# Altium PCB PCB1.PcbDoc
Units mm, origin at the board's own origin, x right, y up, seen from the top; angles counter-clockwise.
Board outline 25.91 x 40.39 mm, 4 copper layers (Top Layer, Mid Layer 1, Mid Layer 2, Bottom Layer), stack 0.97 mm thick; 40 components, 33 nets, 144 pads, 58 vias.
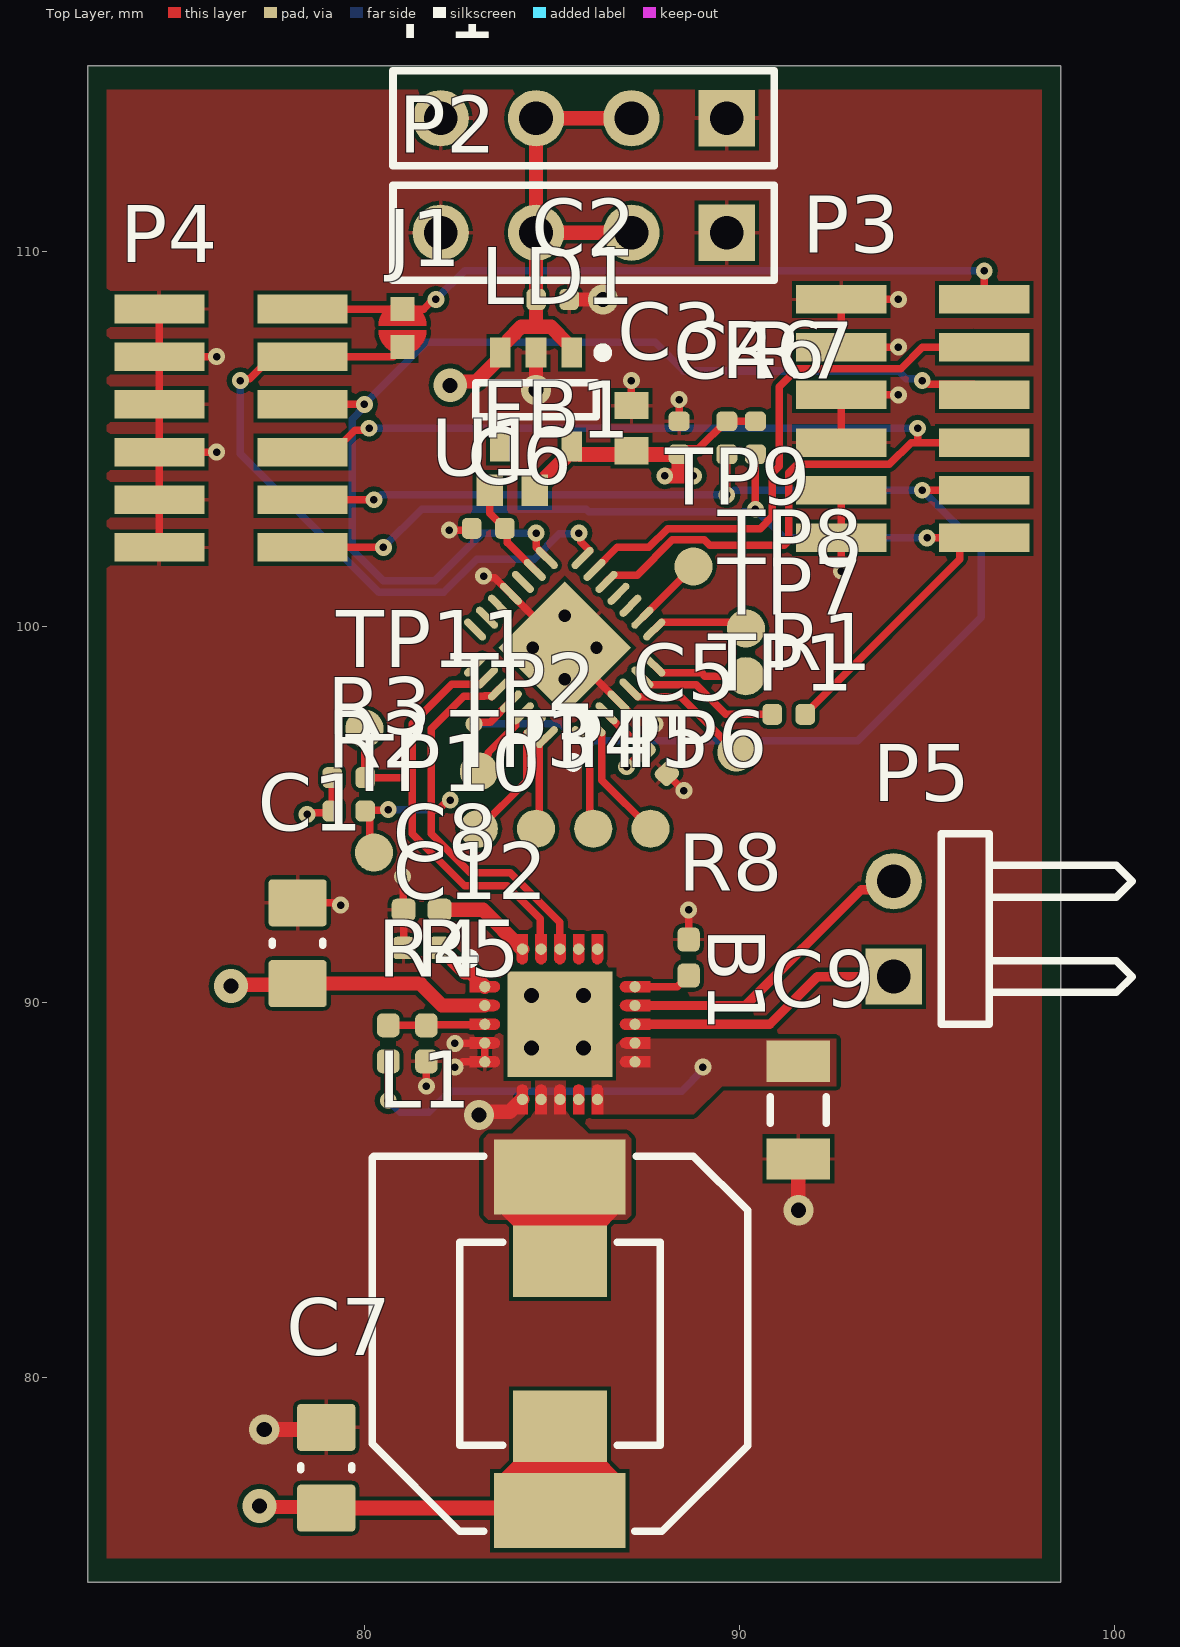
[diagram p0: Top Layer view]
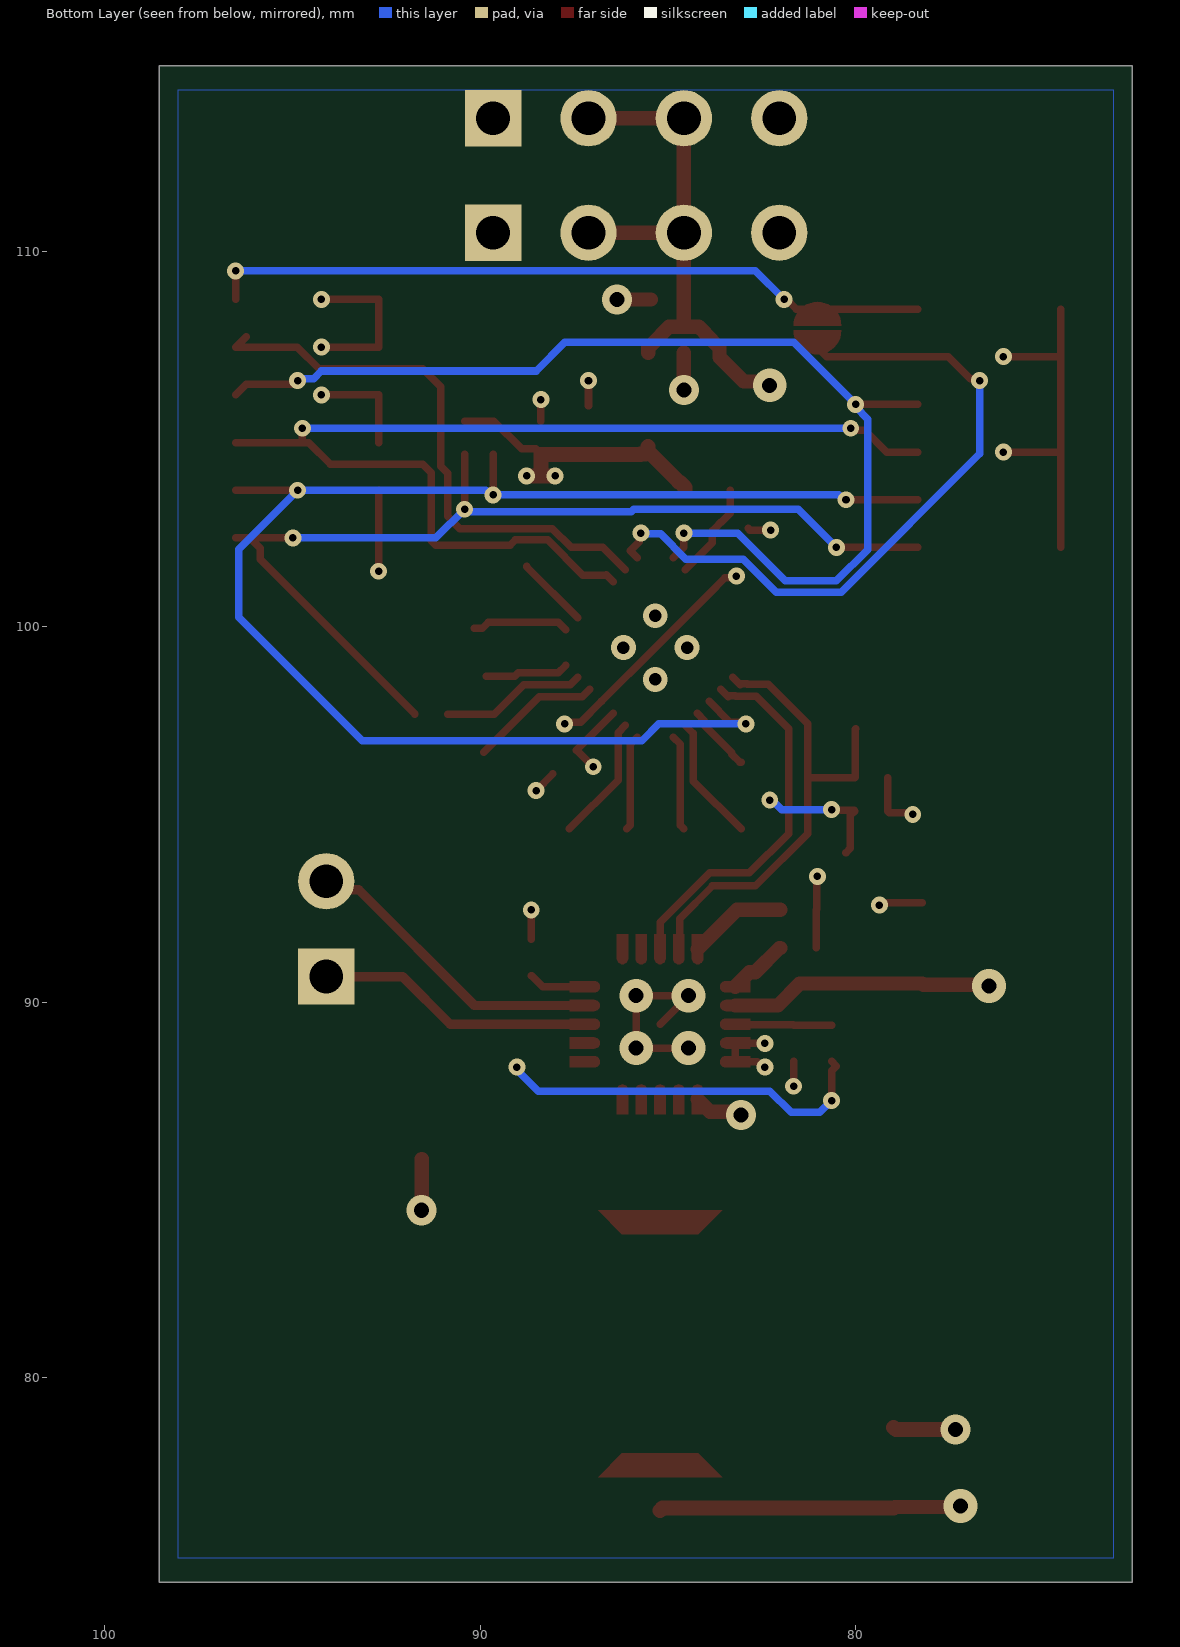
[diagram p1: Bottom Layer view, seen from below]
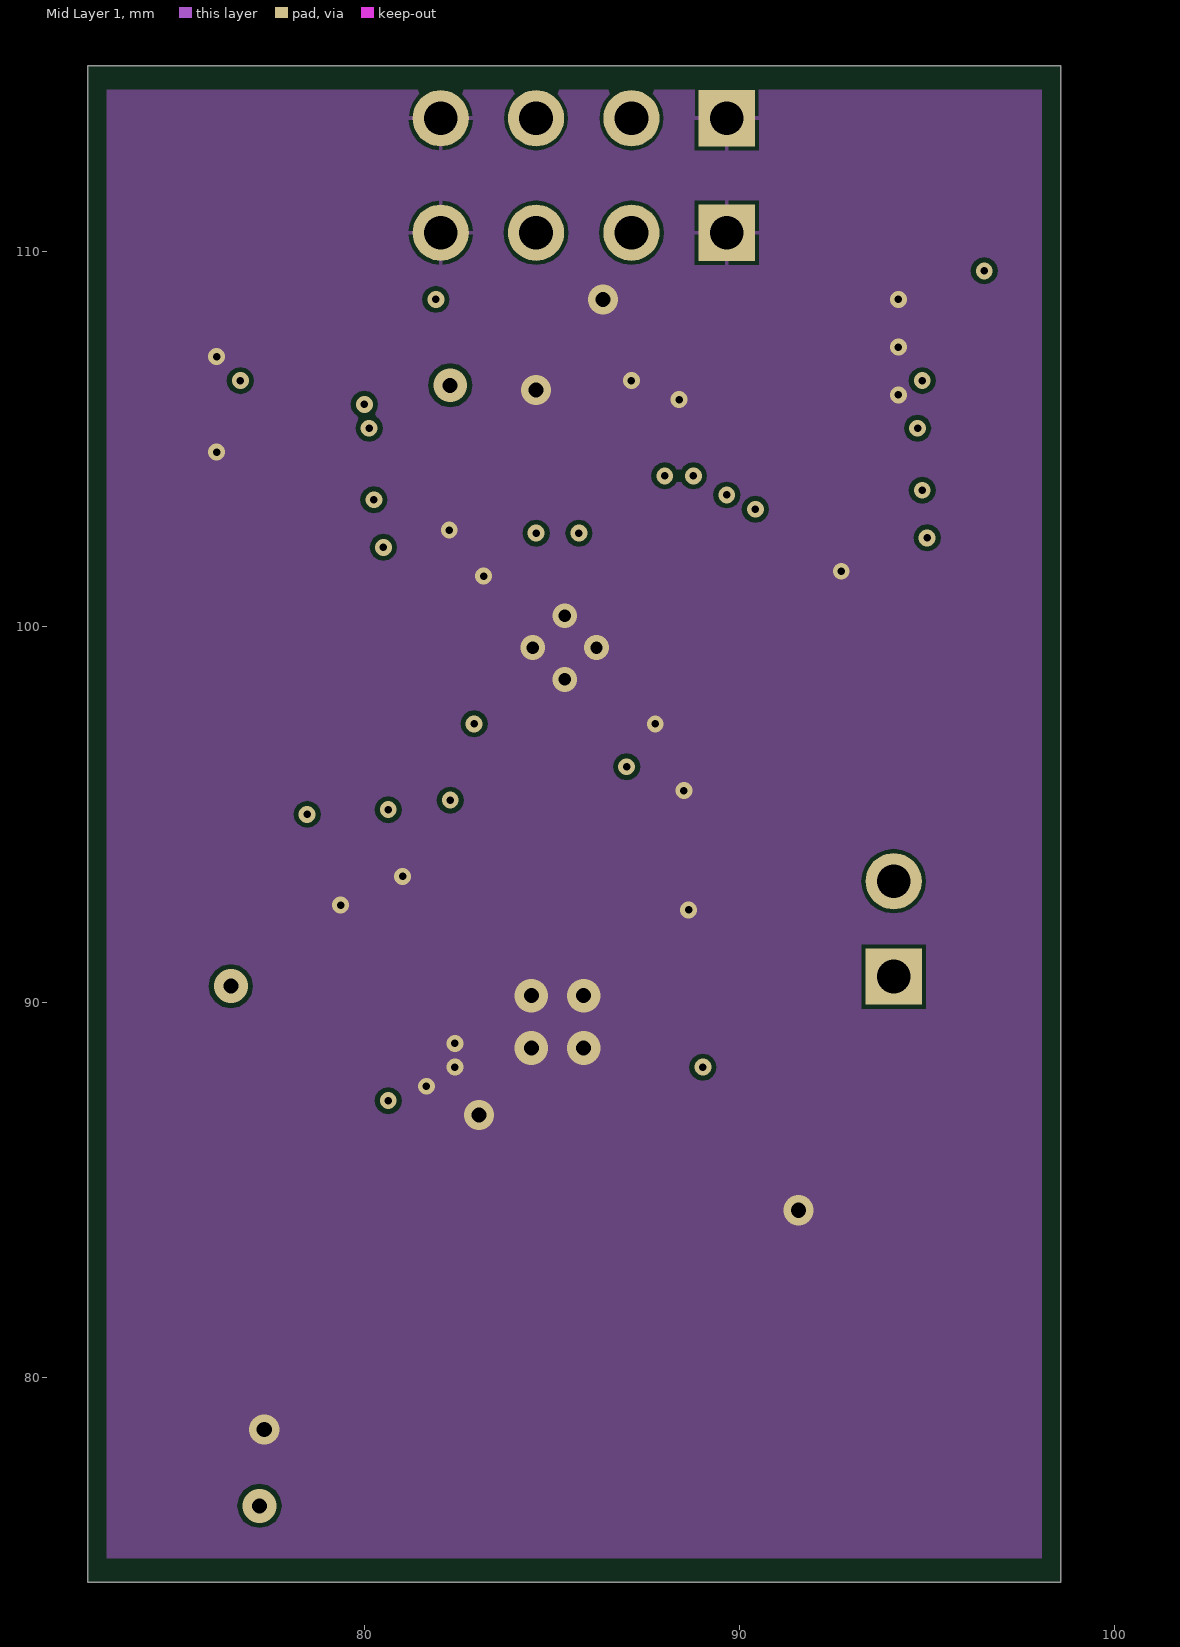
[diagram p2: Mid Layer 1]
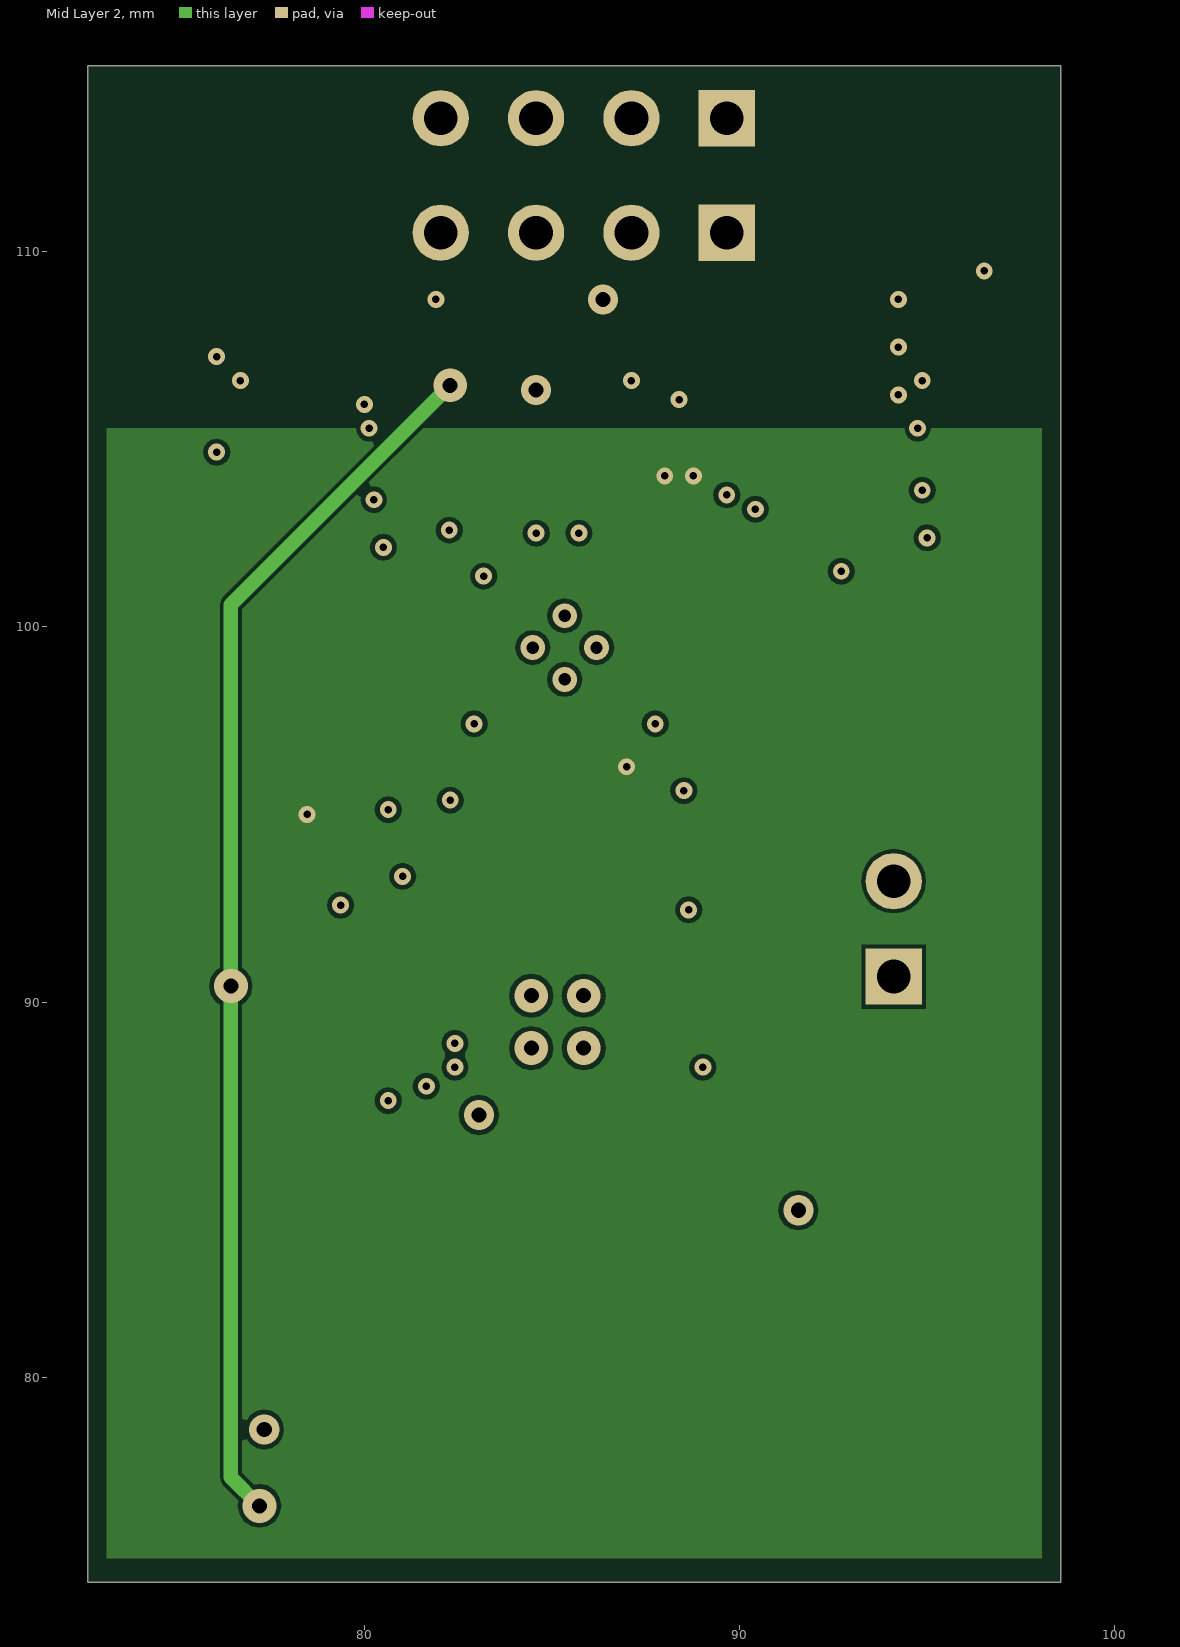
[diagram p3: Mid Layer 2]
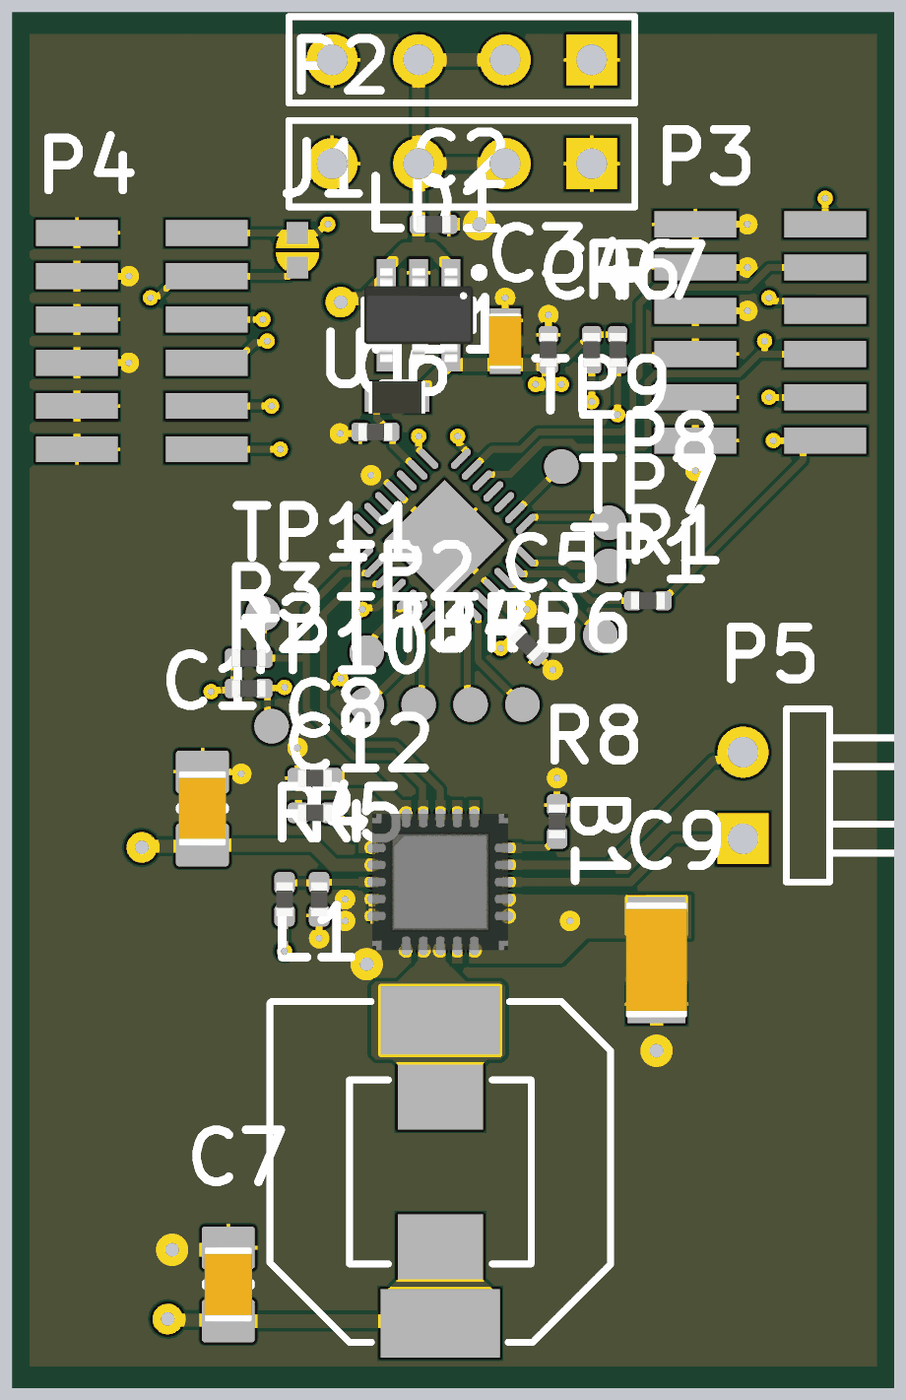
[diagram p4: 3D render of the assembled board from above, using the file's embedded part models]

## Layer stack, top to bottom
Top Solder: solder mask 0.0127, Solder Resist, Dk 3.8
Top Layer: signal copper 0.035
Dielectric 1: prepreg 0.1, 2313, Dk 4.05
Mid Layer 1: signal copper 0.0175
Core: core 0.665, FR-4, Dk 4.5
Mid Layer 2: signal copper 0.0175
Dielectric 2: prepreg 0.1, 2313, Dk 4.05
Bottom Layer: signal copper 0.035
Bottom Solder: solder mask 0.0127, Solder Resist, Dk 3.8

## Board outline
72.644,74.549 72.644,114.935 98.552,114.935 98.552,74.549

## Design rules (kind name [scope] priority, off if disabled: settings)
BoardOutlineClearance [All] p1: gap=0.2 ignorepadtopadclearanceinfootprint=FALSE
Clearance [All] p1: gap=0.102 ignorepadtopadclearanceinfootprint=FALSE except(0.127: Arc-Via Track-Via SMDPad-Via THPad-Via Via-Via Via-Fill Via-Poly Via-Region Via-Text; 0.25: Arc-Hole Track-Hole SMDPad-Hole THPad-Hole Via-Hole Fill-Hole Poly-Hole Region-Hole Text-Hole)
ComponentClearance [All] p1: gap=0.102 collisioncheckmode=3 verticalgap=0.102 showdistances=TRUE
DiffPairsRouting [All] p1: maxlimit=0.102 minlimit=0.102 mostfreqgap=0.102 toplayer_minwidth=0.102 toplayer_maxwidth=1816.048 toplayer_prefwidth=0.102 midlayer1_minwidth=0.102 midlayer1_maxwidth=1816.048 midlayer1_prefwidth=0.102 midlayer2_minwidth=0.102 midlayer2_maxwidth=1816.048 midlayer2_prefwidth=0.102 bottomlayer_minwidth=0.102 bottomlayer_maxwidth=1816.048 bottomlayer_prefwidth=0.102 maxuncoupledlength=12.7
Height [All] p1: minheight=0 maxheight=1816.048 prefheight=12.7
HoleSize [All] p1: absolutevalues=TRUE maxlimit=6.3 minlimit=0.2 maxpercent=80.000 minpercent=20.000
HoleToHoleClearance [All] p1: gap=0.25 allowstackedmicrovias=FALSE
MinimumAnnularRing [All] p1: minimumring=0.076
MinimumSolderMaskSliver [All] p1: minsoldermaskwidth=0
PlaneClearance [All] p1: clearance=0.102
PlaneConnect PlaneConnectPowerPads [InPadClass('PowerPads')] p1: planeconnectstyle=Direct reliefexpansion=0.508 reliefentries=4 reliefconductorwidth=0.254 reliefairgap=0.254
PlaneConnect [All] p2: pad.planeconnectstyle=Relief pad.reliefexpansion=0.3 pad.reliefentries=4 pad.reliefconductorwidth=0.102 pad.reliefairgap=0.102 via.planeconnectstyle=Direct via.reliefexpansion=0.3 via.reliefentries=4 via.reliefconductorwidth=0.127 via.reliefairgap=0.127
PolygonConnect PolygonConnectPowerPads [All vs (InPadClass('PowerPads'))] p1: connectstyle=Direct reliefconductorwidth=0.254 reliefentries=4 polygonreliefangle="90 Angle" airgapwidth=0.254
PolygonConnect [All] p2: thpad.connectstyle=Relief thpad.reliefconductorwidth=0.102 thpad.reliefentries=4 thpad.polygonreliefangle="90 Angle" thpad.airgapwidth=0.102 smdpad.connectstyle=Relief smdpad.reliefconductorwidth=0.102 smdpad.reliefentries=4 smdpad.polygonreliefangle="90 Angle" smdpad.airgapwidth=0.102 via.connectstyle=Direct via.reliefconductorwidth=0.127 via.reliefentries=4 via.polygonreliefangle="90 Angle" via.airgapwidth=0.127
RoutingVias [All] p1: holewidth=0.2 width=0.45 viastyle="Through Hole" minholewidth=0.2 minwidth=0.45 maxholewidth=6.3 maxwidth=6.55
SilkToSilkClearance [All] p1: silktosilkclearance=0
SilkToSolderMaskClearance [IsPad] p1: minsilkscreentomaskgap=0.102 clearancetoexposedcopper=TRUE
SolderMaskExpansion [All] p1: expansion=0.075 istentingtop=FALSE
Width [All] p1: maxlimit=1816.048 minlimit=0.102 preferedwidth=0.102
20 further rules are at their usual default settings.

## Classes and differential pairs
component class U_Sheet2: C1 C7 C8 C9 C12 L1 P5 R4 R5 R8
component class Sheet1: C2 C3 C4 C5 C6 FB1 J1 LD1 P1 P2 P3 P4 R1 R2 R3 R6 R7 TP1 TP2 TP3 TP4 TP5 TP6 TP7 TP8 TP9 TP10 TP11 U1

## Components (designator, comment, footprint, x,y, rotation, side; value= is the part's Value field where it differs from the comment)
B1 "DRV2667RGPT" QFN50P400X400X100-21N-D 85.217,89.408 r0 top
C1 "1uF" C2012_0805I_M 78.232,91.567 r90 top
C2 "100n" R1005_0402i_L 85.022,108.712 r0 top
C3 "1u" C1608_0603I_L 87.122,105.283 r90 top
C4 "100n" R1005_0402i_L 88.392,105.029 r90 top
C5 "100n" R1005_0402i_L 87.757,96.393 r315 top
C6 "100n" R1005_0402i_L 83.312,102.616 r180 top
C7 "10uF" C2012_0805I_M 78.994,77.597 r90 top
C8 "0.1uF" R1005_0402i_M 81.534,92.456 r180 top
C9 "0.1uF" C3216_1206I_L 91.567,87.122 r270 top
C12 "0.1uF" R1005_0402i_M 81.534,91.44 r180 top
FB1 "FERITTE BEAD" R1608_0603I_L 83.947,103.632 r180 top
J1 "Terminator" solderJumper 81.026,107.95 r270 top
L1 "3.3uH" INDUCTOR 85.217,80.899 r90 top
LD1 "NCP115 3.3V" TSOP95P280X110-6L 84.582,106.045 r270 top
P1 "PWR" HDR1X4 89.662,113.538 r180 top
P2 "PWR" HDR1X4 89.662,110.49 r180 top
P3 "Input" "1.27mm SMD conn" 94.615,105.537 r90 top
P4 "Output" "1.27mm SMD conn" 76.454,105.283 r90 top
P5 "Header 2H" HDR1X2H 94.107,90.678 r90 top
R1 "500" R1005_0402i_L 91.313,97.663 r180 top
R2 "10k" R1005_0402i_L 79.592,95.086 r0 top
R3 "10k" R1005_0402i_L 79.592,95.975 r0 top
R4 "768k" R1005_0402i_M 80.645,88.9 r90 top
R5 "9.76k" R1005_0402i_M 81.661,88.9 r270 top
R6 "100k" R1005_0402i_L 89.662,105.029 r270 top
R7 "100k" R1005_0402i_L 90.424,105.029 r270 top
R8 "13k" R1005_0402i_M 88.646,91.186 r90 top
TP1 "PAD" PAD 89.916,96.647 r90 top
TP2 "PAD" PAD 83.058,96.139 r90 top
TP3 "PAD" PAD 83.058,94.615 r90 top
TP4 "PAD" PAD 84.582,94.615 r90 top
TP5 "PAD" PAD 86.106,94.615 r90 top
TP6 "PAD" PAD 87.63,94.615 r90 top
TP7 "PAD" PAD 90.17,98.679 r90 top
TP8 "PAD" PAD 90.17,99.949 r90 top
TP9 "PAD" PAD 88.773,101.6 r90 top
TP10 "PAD" PAD 80.264,93.98 r90 top
TP11 "PAD" PAD 80.01,97.282 r90 top
U1 "ATtiny88-MMU" 28M1_N 85.344,99.441 r135 top

## Footprints (in the part's own frame and the unit in brackets; to place one, negate y for a bottom-side part, rotate by r counter-clockwise, add the part's x,y. Pads: shape width x height; smd on the part's side, far side on the other; paste and mask are expansions set on the pad)
"1.27mm SMD conn" [mm]
  rect 0.76x2.4 smd: 1(3.175,1.905) 2(3.175,-1.905) 3(1.905,1.905) 4(1.905,-1.905) 5(0.635,1.905) 6(0.635,-1.905) 7(-0.635,1.905) 8(-0.635,-1.905) 9(-1.905,1.905) 10(-1.905,-1.905) 11(-3.175,1.905) 12(-3.175,-1.905)
28M1_N [mm] "QFN, 28-Leads, Body 4x4mm, Pitch 0.45mm, IPC Medium Density"
  oval 0.75x0.2 smd: 1(-2.025,1.35) 2(-2.025,0.9) 3(-2.025,0.45) 4(-2.025,0) 5(-2.025,-0.45) 6(-2.025,-0.9) 7(-2.025,-1.35) 15(2.025,-1.35) 16(2.025,-0.9) 17(2.025,-0.45) 18(2.025,0) 19(2.025,0.45) 20(2.025,0.9) 21(2.025,1.35)
  oval 0.2x0.75 smd: 8(-1.35,-2.025) 9(-0.9,-2.025) 10(-0.45,-2.025) 11(0,-2.025) 12(0.45,-2.025) 13(0.9,-2.025) 14(1.35,-2.025) 22(1.35,2.025) 23(0.9,2.025) 24(0.45,2.025) 25(0,2.025) 26(-0.45,2.025) 27(-0.9,2.025) 28(-1.35,2.025)
  rect 2.5x2.5 smd: 29(0,0)
  silkscreen extent -2.45,1.88 -2.2,2.12, body extent -2.02,-2.02 2.02,2.02, height 1
C1608_0603I_L [mm] "Chip Capacitor, 2-Leads, Body 1.57x0.85mm, IPC High Density"
  rect 0.72x0.9 smd: 1(-0.6,0) 2(0.6,0)
  body extent -0.82,-0.48 0.82,0.48, height 0.95
C2012_0805I_M [mm] "Chip Capacitor, 2-Leads, Body 2.05x1.25mm, IPC Low Density"
  rrect15% 1.25x1.55 smd: 1(-1.075,0) 2(1.075,0)
  silkscreen extent -0.05,-0.67 0.05,0.67, body extent -1.1,-0.7 1.1,0.7, height 1.4
C3216_1206I_L [mm] "Chip Capacitor, 2-Leads, Body 3.20x1.60mm, IPC High Density"
  rect 1.1x1.7 smd: 1(-1.3,0) 2(1.3,0)
  silkscreen extent -0.35,-0.75 0.35,0.75, body extent -1.7,-0.9 1.7,0.9, height 1.8
HDR1X2H [mm] "Connector; Header; 2 Position; Right Angle"
  rect 1.5x1.5 hole 0.9: 1(0,0)
  round 1.5 hole 0.9: 2(2.54,0)
  silkscreen extent -1.27,-6.35 3.81,-1.27
HDR1X4 [mm] "Connector; Header; 4 Position"
  rect 1.5x1.5 hole 0.9: 1(0,0)
  round 1.5 hole 0.9: 2(2.54,0) 3(5.08,0) 4(7.62,0)
  silkscreen extent -1.27,-1.27 8.89,1.27
INDUCTOR [mm]
  rect 2x3.5 smd: 1(-4.445,0) 2(4.445,0)
  rect 1.9x2.5 smd: 1(-2.2,0) 2(2.2,0)
  Top Layer region: 3.556,-1.651 2.921,-1.016 2.921,1.016 3.556,1.651
  Top Layer region: -1.143,1.778
  Top Layer region: -3.556,1.651 -2.921,1.016 -2.921,-1.016 -3.556,-1.651
  silkscreen extent -5,-5 5,5
PAD [mil]
  round 40 smd: 1(0,0)
QFN50P400X400X100-21N-D [mm]
  round 0.3 smd: 1(-2,1) 2(-2,0.5) 3(-2,0) 4(-2,-0.5) 5(-2,-1) 6(-1,-2) 7(-0.5,-2) 8(0,-2) 9(0.5,-2) 10(1,-2) 11(2,-1) 12(2,-0.5) 13(2,0) 14(2,0.5) 15(2,1) 16(1,2) 17(0.5,2) 18(0,2) 19(-0.5,2) 20(-1,2)
  rect 2.8x2.8 smd: 21(0,0)
  Top Layer region: -0.85,2.4 -0.85,1.75 -0.855,1.711 -0.87,1.675 -0.894,1.644 -0.925,1.62 -0.961,1.605 -1,1.6 -1.039,1.605 -1.075,1.62 -1.106,1.644 -1.13,1.675 -1.145,1.711 -1.15,1.75 -1.15,1.75 -1.15,2.4 -0.85,2.4
  Top Layer region: -0.35,2.4 -0.35,1.75 -0.355,1.711 -0.37,1.675 -0.394,1.644 -0.425,1.62 -0.461,1.605 -0.5,1.6 -0.539,1.605 -0.575,1.62 -0.606,1.644 -0.63,1.675 -0.645,1.711 -0.65,1.75 -0.65,1.75 -0.65,2.4 -0.35,2.4
  Top Layer region: 0.15,2.4 0.15,1.75 0.145,1.711 0.13,1.675 0.106,1.644 0.075,1.62 0.039,1.605 0,1.6 -0.039,1.605 -0.075,1.62 -0.106,1.644 -0.13,1.675 -0.145,1.711 -0.15,1.75 -0.15,1.75 -0.15,2.4 0.15,2.4
  Top Layer region: 0.65,2.4 0.65,1.75 0.645,1.711 0.63,1.675 0.606,1.644 0.575,1.62 0.539,1.605 0.5,1.6 0.461,1.605 0.425,1.62 0.394,1.644 0.37,1.675 0.355,1.711 0.35,1.75 0.35,1.75 0.35,2.4 0.65,2.4
  Top Layer region: 1.15,2.4 1.15,1.75 1.145,1.711 1.13,1.675 1.106,1.644 1.075,1.62 1.039,1.605 1,1.6 0.961,1.605 0.925,1.62 0.894,1.644 0.87,1.675 0.855,1.711 0.85,1.75 0.85,1.75 0.85,2.4 1.15,2.4
  Top Layer region: 2.4,0.85 1.75,0.85 1.711,0.855 1.675,0.87 1.644,0.894 1.62,0.925 1.605,0.961 1.6,1 1.605,1.039 1.62,1.075 1.644,1.106 1.675,1.13 1.711,1.145 1.75,1.15 1.75,1.15 2.4,1.15 2.4,0.85
  Top Layer region: 2.4,0.35 1.75,0.35 1.711,0.355 1.675,0.37 1.644,0.394 1.62,0.425 1.605,0.461 1.6,0.5 1.605,0.539 1.62,0.575 1.644,0.606 1.675,0.63 1.711,0.645 1.75,0.65 1.75,0.65 2.4,0.65 2.4,0.35
  Top Layer region: 2.4,-0.15 1.75,-0.15 1.711,-0.145 1.675,-0.13 1.644,-0.106 1.62,-0.075 1.605,-0.039 1.6,0 1.605,0.039 1.62,0.075 1.644,0.106 1.675,0.13 1.711,0.145 1.75,0.15 1.75,0.15 2.4,0.15 2.4,-0.15
  Top Layer region: 2.4,-0.65 1.75,-0.65 1.711,-0.645 1.675,-0.63 1.644,-0.606 1.62,-0.575 1.605,-0.539 1.6,-0.5 1.605,-0.461 1.62,-0.425 1.644,-0.394 1.675,-0.37 1.711,-0.355 1.75,-0.35 1.75,-0.35 2.4,-0.35 2.4,-0.65
  Top Layer region: 2.4,-1.15 1.75,-1.15 1.711,-1.145 1.675,-1.13 1.644,-1.106 1.62,-1.075 1.605,-1.039 1.6,-1 1.605,-0.961 1.62,-0.925 1.644,-0.894 1.675,-0.87 1.711,-0.855 1.75,-0.85 1.75,-0.85 2.4,-0.85 2.4,-1.15
  Top Layer region: 0.85,-2.4 0.85,-1.75 0.855,-1.711 0.87,-1.675 0.894,-1.644 0.925,-1.62 0.961,-1.605 1,-1.6 1.039,-1.605 1.075,-1.62 1.106,-1.644 1.13,-1.675 1.145,-1.711 1.15,-1.75 1.15,-1.75 1.15,-2.4 0.85,-2.4
  Top Layer region: 0.35,-2.4 0.35,-1.75 0.355,-1.711 0.37,-1.675 0.394,-1.644 0.425,-1.62 0.461,-1.605 0.5,-1.6 0.539,-1.605 0.575,-1.62 0.606,-1.644 0.63,-1.675 0.645,-1.711 0.65,-1.75 0.65,-1.75 0.65,-2.4 0.35,-2.4
  Top Layer region: -0.15,-2.4 -0.15,-1.75 -0.145,-1.711 -0.13,-1.675 -0.106,-1.644 -0.075,-1.62 -0.039,-1.605 0,-1.6 0.039,-1.605 0.075,-1.62 0.106,-1.644 0.13,-1.675 0.145,-1.711 0.15,-1.75 0.15,-1.75 0.15,-2.4 -0.15,-2.4
  Top Layer region: -0.65,-2.4 -0.65,-1.75 -0.645,-1.711 -0.63,-1.675 -0.606,-1.644 -0.575,-1.62 -0.539,-1.605 -0.5,-1.6 -0.461,-1.605 -0.425,-1.62 -0.394,-1.644 -0.37,-1.675 -0.355,-1.711 -0.35,-1.75 -0.35,-1.75 -0.35,-2.4 -0.65,-2.4
  Top Layer region: -1.15,-2.4 -1.15,-1.75 -1.145,-1.711 -1.13,-1.675 -1.106,-1.644 -1.075,-1.62 -1.039,-1.605 -1,-1.6 -0.961,-1.605 -0.925,-1.62 -0.894,-1.644 -0.87,-1.675 -0.855,-1.711 -0.85,-1.75 -0.85,-1.75 -0.85,-2.4 -1.15,-2.4
  Top Layer region: -2.4,-0.85 -1.75,-0.85 -1.711,-0.855 -1.675,-0.87 -1.644,-0.894 -1.62,-0.925 -1.605,-0.961 -1.6,-1 -1.605,-1.039 -1.62,-1.075 -1.644,-1.106 -1.675,-1.13 -1.711,-1.145 -1.75,-1.15 -1.75,-1.15 -2.4,-1.15 -2.4,-0.85
  Top Layer region: -2.4,-0.35 -1.75,-0.35 -1.711,-0.355 -1.675,-0.37 -1.644,-0.394 -1.62,-0.425 -1.605,-0.461 -1.6,-0.5 -1.605,-0.539 -1.62,-0.575 -1.644,-0.606 -1.675,-0.63 -1.711,-0.645 -1.75,-0.65 -1.75,-0.65 -2.4,-0.65 -2.4,-0.35
  Top Layer region: -2.4,0.15 -1.75,0.15 -1.711,0.145 -1.675,0.13 -1.644,0.106 -1.62,0.075 -1.605,0.039 -1.6,0 -1.605,-0.039 -1.62,-0.075 -1.644,-0.106 -1.675,-0.13 -1.711,-0.145 -1.75,-0.15 -1.75,-0.15 -2.4,-0.15 -2.4,0.15
  Top Layer region: -2.4,0.65 -1.75,0.65 -1.711,0.645 -1.675,0.63 -1.644,0.606 -1.62,0.575 -1.605,0.539 -1.6,0.5 -1.605,0.461 -1.62,0.425 -1.644,0.394 -1.675,0.37 -1.711,0.355 -1.75,0.35 -1.75,0.35 -2.4,0.35 -2.4,0.65
  Top Layer region: -2.4,1.15 -1.75,1.15 -1.711,1.145 -1.675,1.13 -1.644,1.106 -1.62,1.075 -1.605,1.039 -1.6,1 -1.605,0.961 -1.62,0.925 -1.644,0.894 -1.675,0.87 -1.711,0.855 -1.75,0.85 -1.75,0.85 -2.4,0.85 -2.4,1.15
  silkscreen extent -2.52,1.63 -2.27,1.87, body extent -2,-2 2,2, height 1
R1005_0402i_L [mm] "Resistor, Chip; 1.00 mm L X 0.50 mm W X 0.40 mm H body"
  rrect50% 0.52x0.56 smd: 1(-0.44,0) 2(0.44,0)
  body extent -0.5,-0.25 0.5,0.25, height 0.4
R1005_0402i_M [mm] "Resistor, Chip; 1.00 mm L X 0.50 mm W X 0.40 mm H body"
  rrect50% 0.64x0.6 smd: 1(-0.48,0) 2(0.48,0)
  body extent -0.5,-0.25 0.5,0.25, height 0.4
R1608_0603I_L [mm] "Chip Resistor, 2-Leads, Body 1.57x0.85mm, IPC High Density"
  rect 0.7x0.85 smd: 1(-0.6,0) 2(0.6,0)
  body extent -0.82,-0.48 0.82,0.48, height 0.5
solderJumper [mil]
  rect 25x25 smd: 1(20,0) 2(-20,0)
  Top Layer region: 2.51,25 12.08,23.1 20.19,17.68 25.61,9.57 27.51,0 27.51,0 25.61,-9.57 20.19,-17.68 12.08,-23.1 2.51,-25 2.51,-25
  Top Layer region: -2.51,25 -12.08,23.1 -20.19,17.68 -25.61,9.57 -27.51,0 -27.51,0 -25.61,-9.57 -20.19,-17.68 -12.08,-23.1 -2.51,-25 -2.51,-25
TSOP95P280X110-6L [mm]
  rect 0.8x0.55 smd: 1(-1.25,0.95) 2(-1.25,0) 3(-1.25,-0.95) 4(1.25,-0.95) 5(1.25,0.95)
  silkscreen extent -1.37,-1.6 0.45,1.9, body extent -1.38,-1.6 1.38,1.6, height 1.1

## Part data
B1: "Motor / Motion / Ignition Controllers & Drivers Piezo Haptic Dvr w/ Boost Digital FE", Manufacturer_Name="Texas Instruments", Mouser Part Number=595-DRV2667RGPT, Datasheet Link=https://www.ti.com/lit/ds/symlink/drv2667.pdf?HQS=TI-null-null-digikeymode-df-pf-null-wwe&ts=1600079349195, Geometry.Height=1mm, Manufacturer_Part_Number=DRV2667RGPT, Mouser Price/Stock=https://www.mouser.co.uk/ProductDetail/Texas-Instruments/DRV2667RGPT?qs=5T7hXpf2iWdxn16iAzW0AQ%3D%3D
C1 C2 C3 C4 C5 C6 C7 C8 C9 C12: library part C, "Capacitor"
J1: library part JMP_mini
L1: library part L, "L"
P1 P2: library part "Header 4", "Header, 4-Pin", LatestRevisionDate=17-Jul-2002, LatestRevisionNote="Re-released for DXP Platform.", Publisher="Altium Limited"
P3 P4: library part "Header 6X2", "Header, 6-Pin, Dual row", LatestRevisionDate=17-Jul-2002, LatestRevisionNote="Re-released for DXP Platform.", Publisher="Altium Limited"
P5: "Header, 2-Pin, Right Angle", LatestRevisionDate=17-Jul-2002, LatestRevisionNote="Re-released for DXP Platform.", Publisher="Altium Limited"
R1 R2 R3 R4 R5 R6 R7 R8: library part R, "R"
U1: "8-bit AVR Microcontroller, 1.8-5.5V, 8KB Flash, 64 Bytes EEPROM, 512 Bytes SRAM, 28-pin MLF, Industrial Grade (-40°C to 85°C), Pb-Free", Supplier Part Number 1=ATTINY88-MMU-ND, ComponentLink1Description="Manufacturer Link", ComponentLink1URL=http://www.atmel.com/products/avr/default.asp?, ComponentLink2Description="ATtiny48/88 Datasheet", ComponentLink2URL=http://www.atmel.com/dyn/resources/prod_documents/doc8008.pdf, ComponentLink3Description="ATtiny48/88 Summary", ComponentLink3URL=http://www.atmel.com/dyn/resources/prod_documents/8008S.pdf, ComponentLink4Description="Atmel.com Home", ComponentLink4URL=http://www.atmel.com, DatasheetVersion="revC, Mar-2009", PackageDescription="28-pad, 4x4x1.0mm Body, Pitch 0.45mm, 2.4x2.4mm Exposed Pad, Plastic Very Thin QFN Package (VQFN)", PackageReference=28M1, PackageVersion="revB, Nov-2008", Published=1-Apr-2010, Publisher="Altium Limited", Supplier 1=Digi-Key, Supplier 2=Mouser, Supplier Part Number 2=556-ATTINY88-MMU

## Via types
v1: diameter 0.45, hole 0.2, Top Layer to Bottom Layer, 42 vias
v2: diameter 0.9, hole 0.4, Top Layer to Bottom Layer, 7 vias
v3: diameter 0.8, hole 0.4, Top Layer to Bottom Layer, 5 vias
v4: diameter 0.66, hole 0.33, Top Layer to Bottom Layer, tented top, 4 vias

## Nets (pads, with @x,y where several pads share a name; then routed paths per layer and width w, separated by ;. In a path a pad name is that pad's centre, name@x,y a point inside that pad or via, vN(x,y) a via of type N, cw(c..) or ccw(c..) an arc to the next point about the centre after c; other vN are vias at no path point)
+3.3V: C3.1 C4.1 C5.1 FB1.1 LD1.5 R2.1 R3.1 R6.1 R7.1 U1.3 | length 11.8
  Top Layer w0.2: v1(78.486,94.996) 78.531,95.041 79.107,95.041 R2.1 R3.1 ; U1.3 C5.1@87.444,96.704 ; v1(86.995,96.266) 87.001,96.266 87.44,96.704 C5.1@87.444,96.704 ; C5.1 C5.1@87.444,96.704 ; C4.1 88.533,104.73 88.903,104.73 89.642,105.469 R6.1 R7.1
  Top Layer w0.4: FB1.1 84.547,103.707 84.697,103.857 84.719,103.857 LD1.5@85.532,104.67 ; LD1.5 LD1.5@85.532,104.67 ; v1(88.011,104.013) 88.392,104.013 ; v1(88.773,104.013) 88.392,104.013 ; LD1.5@85.532,104.67 85.607,104.595 85.732,104.595 85.738,104.589 C4.1 88.392,104.013
+5: B1.2 C1.1 C2.1 C7.1 L1.1 LD1.1 LD1.3 P1.2 P1.3 P2.2 P2.3 | length 62.7
  Top Layer w0.381: v2(76.454,90.424) 76.488,90.458 78.198,90.458 C1.1 81.494,90.492 82.078,89.908 B1.2 ; v2(77.216,76.581) 77.245,76.552 78.965,76.552 C7.1 ; v2(82.296,106.426) 82.395,106.525 82.987,106.525 83.632,107.17 LD1.3 83.632,107.42 84.015,107.803 84.015,107.816 84.186,107.987 84.582,107.987 ; LD1.1 85.532,107.42 85.178,107.774 85.178,107.787 84.978,107.987 84.582,107.987 ; P2.2 P2.3 ; P1.2 P1.3 P2.3 ; 84.582,107.987 P2.3
  Top Layer w0.4: C7.1 85.149,76.522 L1.1@85.217,76.454
  Mid Layer 2 w0.381: v2(77.216,76.581) 76.454,77.343 v2(76.454,90.424) 76.454,100.584 v2(82.296,106.426)
AVCC: C6.1 FB1.2 U1.16 | length 2.6
  Top Layer w0.2: FB1.2 83.347,103.021 83.591,102.777 83.594,102.777 83.752,102.62 C6.1 83.82,102.548 83.82,102.235 83.823,102.235 U1.16
GND: B1.4 B1.5 B1.6 B1.21 C1.2 C2.2 C3.2 C4.2 C5.2 C6.2 C7.2 C8.2 C9.2 C12.2 LD1.2 P1.1 P1.4 P2.1 P2.4 P3.1 P3.3 P3.5 P3.7 P3.9 P3.11 P4.1 P4.3 P4.5 P4.7 P4.9 P4.11 R5.2 R8.2 U1.4 U1.18 U1.29 | length 45.8
  Top Layer w0.2: P4.11 P4.7 ; P4.1 P4.3 ; v1(76.073,104.648) P4.7 ; v1(76.073,107.188) P4.3 ; C1.2 79.375,92.642 v1(79.375,92.583) ; v1(81.026,93.345) 81.04,93.331 81.04,92.47 C8.2 C12.2 ; v1(81.661,87.757) R5.2 ; v1(82.27,102.571) 82.827,102.571 C6.2 ; v1(82.423,88.265) 82.491,88.265 82.634,88.408 B1.5 B1.4 83.213,88.904 82.427,88.904 v1(82.423,88.9) ; v1@83.312,101.346 v1(83.185,101.346) 83.233,101.298 83.487,101.298 U1.18 U1.29 U1.4 87.328,97.457 87.709,97.457 v1(87.757,97.409) ; v2(84.455,88.773) v2(85.852,88.773) v2(85.852,90.17) v2(84.455,90.17) B1.21 ; C3.2 v1(87.122,106.553) ; C5.2 v1(88.519,95.631) ; C4.2 v1(88.392,106.045) ; R8.2 v1(88.646,92.456) ; v1(92.71,101.473) P3.11 P3.9 ; P3.7 P3.5 v1(94.234,106.172) ; v1(94.234,107.442) P3.3 P3.1 v1(94.234,108.712) ; P4.7 P4.5 P4.3
  Top Layer w0.381: v3(83.058,86.995) 83.138,87.075 83.884,87.075 B1.6 ; v3(84.582,106.299) LD1.2 ; C2.2 v3(86.36,108.712) ; v3(91.567,84.455) C9.2
  Top Layer w0.4: v3(77.343,78.613) 78.935,78.613 C7.2
  other v4: 85.344,98.592 84.495,99.441 86.193,99.441 85.344,100.29
INT: P3.12 P4.12 R1.1 R7.2 | length 26.9
  Top Layer w0.2: P4.12 v1(80.518,102.108) ; v1(90.424,103.124) R7.2 ; R1.1 91.753,97.683 95.869,101.799 95.869,102.082 P3.12@96.149,102.362 ; v1(94.996,102.362) P3.12@96.149,102.362 ; P3.12 P3.12@96.149,102.362
  Bottom Layer w0.2: v1(80.518,102.108) 81.534,103.124 85.915,103.124 85.986,103.053 90.353,103.053 v1(90.424,103.124) 91.186,102.362 v1(94.996,102.362)
MISO: J1.2 P3.2 P4.2 | length 19.3
  Top Layer w0.2: P4.2 81.593,108.458 81.847,108.712 v1(81.915,108.712) ; P3.2 v1(96.52,109.474)
  Bottom Layer w0.2: v1(81.915,108.712) 82.677,109.474 v1(96.52,109.474)
MISO_T88: J1.1 P4.4 U1.14 | length 18.7
  Top Layer w0.2: v1(76.708,106.553) 76.756,106.601 76.952,106.601 77.539,107.188 P4.4 80.772,107.188 J1.1 ; v1(85.725,102.489) 85.773,102.441 85.773,102.265 86.016,102.022 U1.14
  Bottom Layer w0.2: v1(76.708,106.553) 76.708,104.602 80.393,100.917 82.117,100.917 82.998,101.798 84.53,101.798 85.2,102.468 85.704,102.468 v1(85.725,102.489)
MOSI_T88: P3.4 U1.13 | length 15.1
  Top Layer w0.2: U1.13 86.738,102.108 87.584,102.108 88.088,102.611 90.55,102.611 90.876,102.937 90.876,104.084 91.056,104.264 91.056,106.383 91.533,106.86 94.292,106.86 94.873,107.442 P3.4 P3.4@96.24,107.722
NetB1_1: B1.1 C12.1 | length 1.6
  Top Layer w0.381: C12.1 82.034,91.44 82.682,90.792 82.833,90.792 B1.1
NetB1_3: B1.3 R4.2 R5.1 | length 2.6
  Top Layer w0.2: R4.2 R5.1 81.675,89.394 83.203,89.394 B1.3
NetB1_7: B1.7 B1.8 L1.2
NetB1_10: B1.10 B1.11 B1.12 C9.1 R4.1 | length 10.2
  Top Layer w0.2: v1(80.645,87.376) 80.645,88.166 80.518,88.293 R4.1
  Bottom Layer w0.2: v1(80.645,87.376) 80.961,87.06 81.726,87.06 82.296,87.63 88.46,87.63 89.027,88.197 v1(89.027,88.265)
NetB1_13: B1.13 P5.1 | length 7.4
  Top Layer w0.25: B1.13 90.805,89.408 92.075,90.678 P5.1
NetB1_14: B1.14 P5.2 | length 8.3
  Top Layer w0.25: B1.14 90.162,89.908 93.244,92.99 93.879,92.99 P5.2
NetB1_15: B1.15 R8.1 | length 1.6
  Top Layer w0.2: B1.15 88.341,90.408 88.639,90.706 R8.1
NetB1_16: B1.16
NetB1_17: B1.17
NetB1_20: B1.20 C8.1 | length 2.6
  Top Layer w0.381: C8.1 83.169,92.456 B1.20
NetR1_2: R1.2 U1.6 | length 3.9
  Top Layer w0.2: U1.6 87.607,98.451 88.848,98.451 89.636,97.663 R1.2
NetTP1_1: TP1.1 U1.5 | length 3.5
  Top Layer w0.2: U1.5 87.289,98.133 88.43,98.133 TP1.1
NetTP2_1: TP2.1 U1.26 | length 1.8
  Top Layer w0.2: TP2.1@83.058,96.393 83.091,96.393 83.302,96.604 83.302,96.637 84.036,97.371 84.036,97.496 U1.26
NetTP3_1: TP3.1 U1.27 | length 3.4
  Top Layer w0.2: TP3.1 84.328,95.885 84.328,97.152 U1.27
NetTP4_1: TP4.1 U1.28 | length 2.6
  Top Layer w0.2: TP4.1 84.672,94.705 84.672,96.86 U1.28
NetTP5_1: TP5.1 U1.1 | length 2.6
  Top Layer w0.2: U1.1 86.016,96.86 86.016,94.705 TP5.1
NetTP6_1: TP6.1 U1.2 | length 3.4
  Top Layer w0.2: U1.2 86.334,97.178 86.334,95.911 TP6.1
NetTP7_1: TP7.1 U1.7 | length 2.2
  Top Layer w0.2: U1.7 87.925,98.769 88.991,98.769 89.081,98.679 TP7.1@89.839,98.679
NetTP8_1: TP8.1 U1.8 | length 2.6
  Top Layer w0.2: U1.8 87.925,100.113 89.785,100.113 89.949,99.949 TP8.1
NetTP9_1: TP9.1 U1.9 | length 1.9
  Top Layer w0.2: U1.9 88.773,101.597 TP9.1
R\E\S\E\T\: P3.10 P4.10 R6.2 U1.25 | length 39.7
  Top Layer w0.2: P4.10 v1(80.264,103.378) ; v1(82.931,97.409) 82.979,97.457 83.36,97.457 U1.25 ; v1(89.662,103.505) R6.2 ; v1(94.869,103.632) P3.10
  Bottom Layer w0.2: v1(80.264,103.378) 80.332,103.378 80.459,103.505 v1(89.662,103.505) 89.73,103.505 89.857,103.632 v1(94.869,103.632) 96.437,102.064 96.437,100.247 93.147,96.957 85.697,96.957 85.245,97.409 v1(82.931,97.409)
S\S\: P3.8 P4.8 U1.12 | length 29.8
  Top Layer w0.2: P4.8 79.179,104.648 79.766,105.235 80.089,105.235 v1(80.137,105.283) ; U1.12 86.652,101.386 86.674,101.363 86.84,101.363 86.845,101.369 87.272,101.369 88.213,102.31 89.067,102.31 89.213,102.164 91.191,102.164 91.308,102.281 91.308,104.096 91.533,104.32 93.994,104.32 94.575,104.902 94.742,104.902 ; v1(94.742,105.283) 94.742,104.902 ; P3.8 94.742,104.902
  Bottom Layer w0.2: v1(80.137,105.283) v1(94.742,105.283)
SCK: P3.6 P4.6 U1.15 | length 30
  Top Layer w0.2: P4.6 v1(80.01,105.918) ; v1(84.582,102.489) 84.582,102.112 U1.15 ; v1(94.869,106.553) 94.937,106.553 95.038,106.452 96.24,106.452 P3.6
  Bottom Layer w0.2: v1(84.582,102.489) 83.151,102.489 81.881,101.219 80.518,101.219 79.685,102.052 79.685,105.525 80.01,105.85 v1(80.01,105.918) 81.661,107.569 87.757,107.569 88.519,106.807 94.238,106.807 94.444,106.601 94.821,106.601 v1(94.869,106.553)
SCL: B1.18 R2.2 TP10.1 U1.24 | length 14.4
  Top Layer w0.2: TP10.1 80.148,94.096 80.148,94.97 R2.2 80.05,95.104 80.626,95.104 v1(80.645,95.123) ; v1(82.296,95.377) 82.228,95.377 81.974,95.123 81.788,95.123 ; U1.24 83.399,98.133 83.377,98.155 83.212,98.155 83.206,98.149 82.655,98.149 81.788,97.282 81.788,95.123 ; B1.18 85.217,92.121 83.897,93.441 82.835,93.441 81.788,94.488 81.788,95.123
  Bottom Layer w0.2: v1(80.645,95.123) 81.974,95.123 82.228,95.377 v1(82.296,95.377)
SDA: B1.19 R3.2 TP11.1 U1.23 | length 13.2
  Top Layer w0.2: TP11.1 80.021,97.271 80.021,95.986 R3.2 81.243,95.975 81.28,96.012 ; U1.23 83.081,98.451 83.059,98.473 82.893,98.473 82.888,98.468 82.339,98.468 81.28,97.409 81.28,96.012 ; B1.19 84.698,91.427 84.698,92.213 83.82,93.091 82.677,93.091 81.28,94.488 81.28,96.012
pads on no net: B1.9 LD1.4 U1.10 U1.11 U1.17 U1.19 U1.20 U1.21 U1.22

## Polygon pours and split planes (outlines as drawn)
GND on Top Layer "NONET_L-01_P-001" (solid, remove dead copper, pour order 5): 73.152,114.3 73.152,75.184 98.044,75.184 98.044,114.3
NetB1_7 on Top Layer "NONET_L-01_P-001" (solid, remove dead copper, pour order 1): 84.567,87.906 85.367,87.906 85.367,87.106 85.986,86.487 86.995,86.487 87.122,86.36 87.122,84.328 86.995,84.201 83.312,84.201 83.185,84.328 83.185,86.36 83.312,86.487 83.948,86.487 84.567,87.106
NetB1_10 on Top Layer "NONET_L-01_P-001" (solid, remove dead copper, pour order 0): 86.892,89.038 86.067,88.213 86.067,87.008 88.786,87.008 89.535,87.757 92.583,87.757 92.583,89.027
no net on Bottom Layer "NONET_L-01_P-001" (solid, remove dead copper, pour order 4): 73.152,114.3 73.152,75.184 98.044,75.184 98.044,114.3
+3.3V on Mid Layer 2 "NONET_L-01_P-001" (solid, remove dead copper, pour order 3): 73.152,105.283 73.152,75.184 98.044,75.184 98.044,105.283
GND on Mid Layer 1 "NONET_L-01_P-001" (solid, remove dead copper, pour order 2): 73.152,114.3 73.152,75.184 98.044,75.184 98.044,114.3

## Silkscreen, mask and mechanical layers (free items; w line width, h text height)
Mechanical 1:
  the board outline again, w0.2